# Altium PCB PCB1.PcbDoc
Units mm, origin at the board's own origin, x right, y up, seen from the top; angles counter-clockwise.
Board outline 37.97 x 24.64 mm, 2 copper layers (Top Layer, Bottom Layer); 5 components, 4 nets, 20 pads, 0 vias.
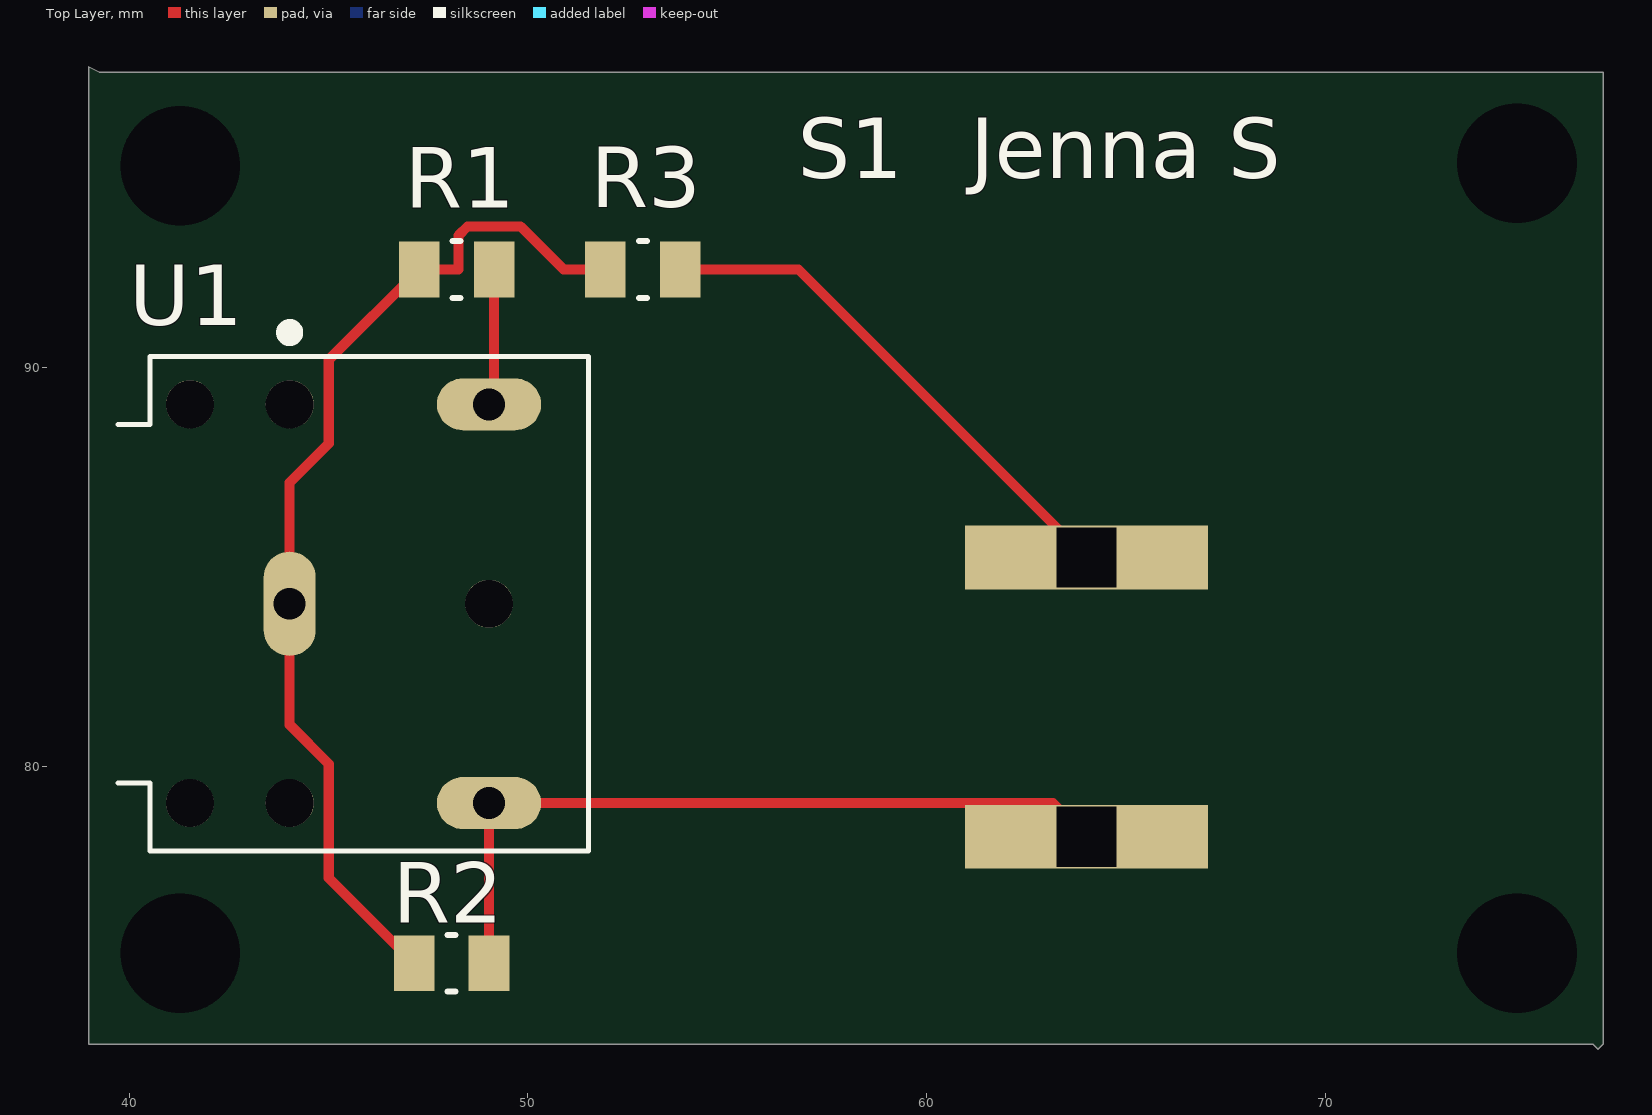
[diagram p0: Top Layer view]
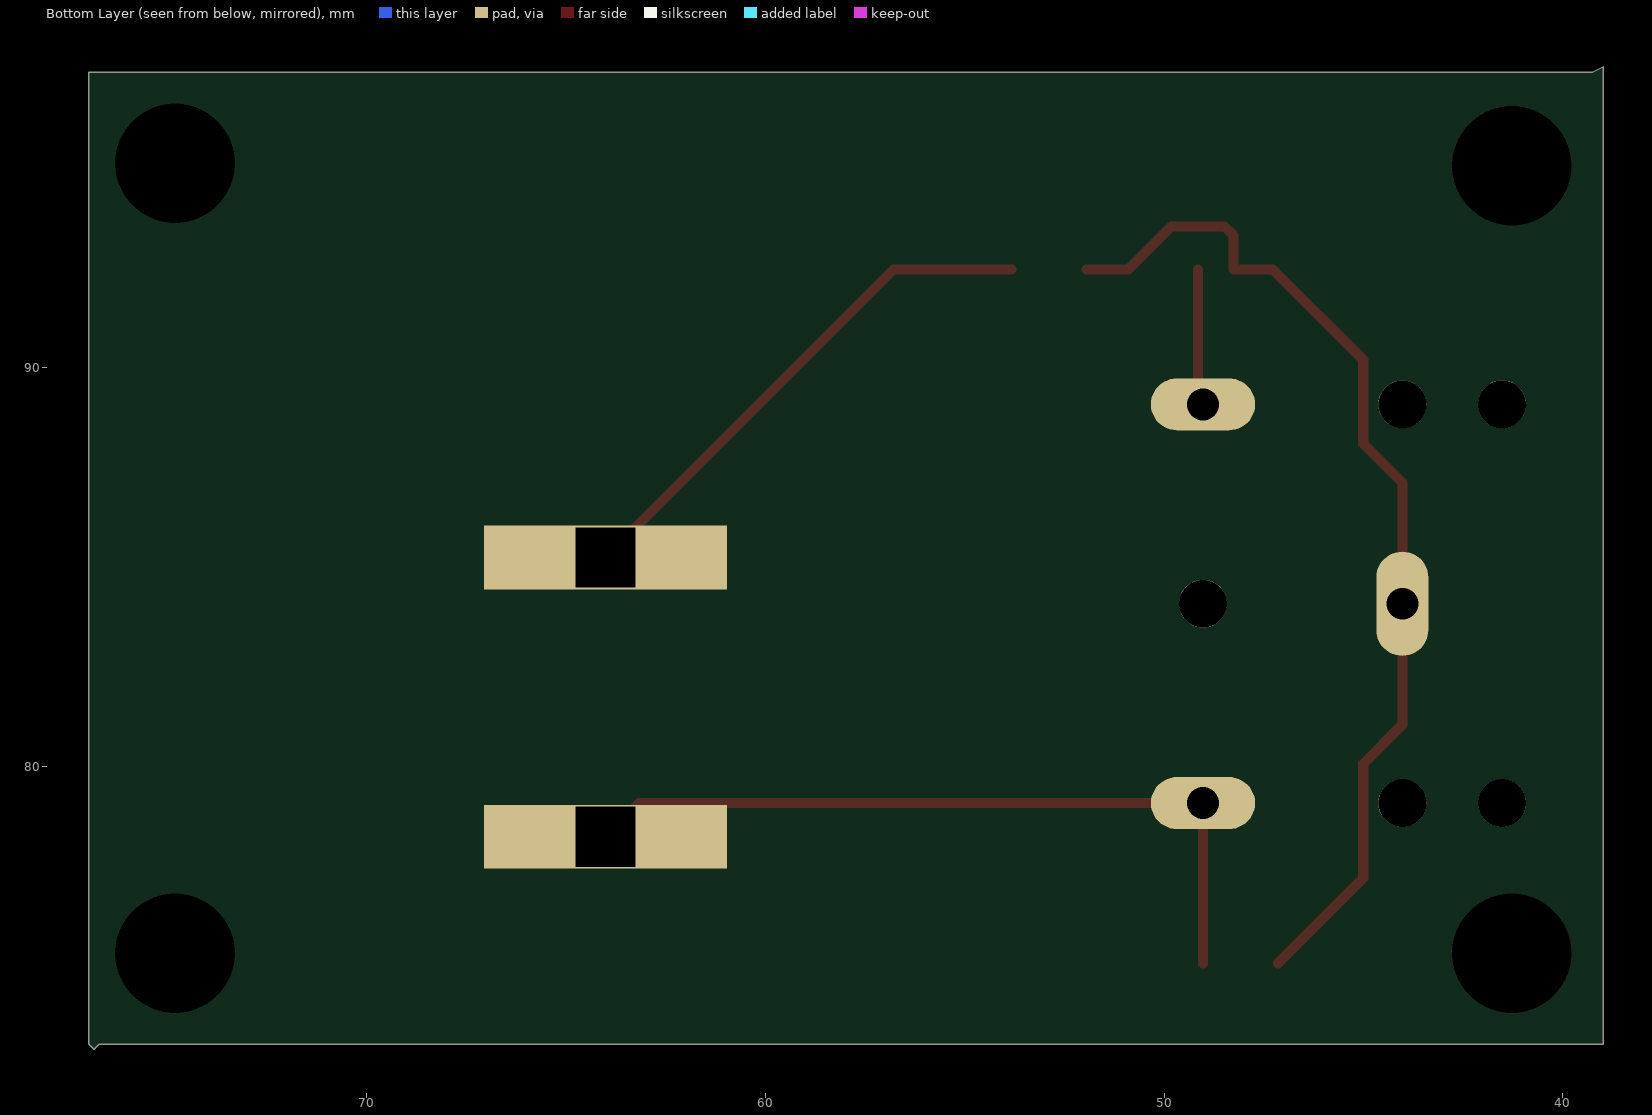
[diagram p1: Bottom Layer view, seen from below]

## Layer stack, top to bottom
Top Solder: solder mask 0.0102, Solder Resist, Dk 3.5
Top Layer: signal copper 0.0356
Dielectric 1: dielectric 0.32, FR-4, Dk 4.8
Bottom Layer: signal copper 0.0356
Bottom Solder: solder mask 0.0102, Solder Resist, Dk 3.5

## Board outline
38.989,97.536 38.989,73.025 76.708,73.025 76.835,72.898 76.962,73.025 76.962,97.409 39.243,97.409

## Design rules (kind name [scope] priority, off if disabled: settings)
Clearance [All] p1: gap=0.254 ignorepadtopadclearanceinfootprint=FALSE except(0: Arc-Hole Track-Hole SMDPad-Hole THPad-Hole Via-Hole Fill-Hole Poly-Hole Region-Hole Text-Hole)
PolygonConnect [All] p1: connectstyle=Relief reliefconductorwidth=0.254 reliefentries=4 polygonreliefangle="90 Angle" airgapwidth=0.254
RoomDefinition EStop [InComponentClass('EStop')] p1: confinementstyle=ConfineIn formatcopy=TRUE lockcomponents=FALSE outline 38.989,96.774 39.116,96.647 39.116,73.279 76.581,73.279 76.835,73.533 76.708,73.66 76.708,97.409 39.751,97.409 39.116,96.774
RoutingVias [All] p1: holewidth=0.711 width=1.27 viastyle="Through Hole" minholewidth=0.711 minwidth=1.27 maxholewidth=0.711 maxwidth=1.27
SolderMaskExpansion [All] p1: expansion=0.102
Width [All] p1: maxlimit=0.254 minlimit=0.254 preferedwidth=0.254
30 further rules are at their usual default settings.

## Components (designator, comment, footprint, x,y, rotation, side; value= is the part's Value field where it differs from the comment)
R1 "2.2k" RESC2013X65N 48.209,92.456 r180 top
R2 "2.2k" RESC2013X65N 48.082,75.057 r0 top
R3 "560" RESC2013X65N 52.883,92.456 r0 top
S1 "SPST Rocker" "SWITCH ROCKER SPST 10A 125V" 64.008,78.232 r0 top
U1 "35mm Aux Header" "35mm Aux Header" 45.265,84.047 r0 top

## Footprints (in the part's own frame and the unit in brackets; to place one, negate y for a bottom-side part, rotate by r counter-clockwise, add the part's x,y. Pads: shape width x height; smd on the part's side, far side on the other; paste and mask are expansions set on the pad)
"35mm Aux Header" [mm]
  oval 1.308x2.616 hole 0.8: 1(-1.243,0.027)
  oval 2.616x1.308 hole 0.8: 2(3.757,-4.973) 3(3.757,5.027)
  round 1.2 hole 1.2 unplated: None(-3.743,-4.973) None(-3.743,5.027) None(-1.243,-4.973) None(-1.243,5.027) None(3.757,0.027)
  silkscreen extent -5.54,-6.17 6.26,7
RESC2013X65N [mil]
  rect 40x55 smd: 1(-37,0) 2(37,0)
  silkscreen extent -4,-28 4,28
"SWITCH ROCKER SPST 10A 125V" [mm]
  rect 6.1x1.6 hole 1.5 square: 0(0,0) 1(0,7)
  body extent -7.3,-3.1 7.3,15.9, height 13.69

## Part data
R1 R2: library part "RES 2.2k 0805", "RES SMD 2.2K OHM 1% 1/8W 0805", Package=0805, Rating=0.125W, Tolerance=1%, Digikey=311-2.20KCRCT-ND, Digikey Link=https://www.digikey.ca/product-detail/en/yageo/RC0805FR-072K2L/311-2.20KCRCT-ND/730623, MF=Yageo, MP=RC0805FR-072K2L, Price="0.15 CAD"
R3: library part "RES 560 0805", "RES 560 OHM 1% 1/8W 0805", Package=0805, Rating=0.125W, Tolerance=1%, Digikey=RMCF0805FT560RCT-ND, Digikey Link=https://www.digikey.ca/product-detail/en/stackpole-electronics-inc/RMCF0805FT560R/RMCF0805FT560RCT-ND/2418431, MF="Stackpole Electronics Inc", MP=RMCF0805FT560R, Price="0.15 CAD"
S1: library part "SWITCH ROCKER SPST 10A 125V", "Rocker Switch SPST 10A (AC) 125V Panel Mount, Snap-In", Rating="10A 125V", Digikey=CH755-ND, Digikey Link=https://www.digikey.ca/product-detail/en/zf-electronics/SRB22A2FBBNN/CH755-ND/446021, MF="ZF Electronics", MP=SRB22A2FBBNN, Price="1.276 CAD"

## Free pads (board coordinates)
  round 1.524 hole 3: 1(41.275,75.311) 2(74.803,75.311) 3(74.803,95.123) 4(41.275,95.059)

## Nets (pads, with @x,y where several pads share a name; then routed paths per layer and width w, separated by ;. In a path a pad name is that pad's centre, name@x,y a point inside that pad or via, vN(x,y) a via of type N, cw(c..) or ccw(c..) an arc to the next point about the centre after c; other vN are vias at no path point)
NetR1_1: R1.1 U1.3 | length 3.4
  Top Layer w0.254: U1.3 49.149,89.201 R1.1
NetR1_2: R1.2 R2.1 R3.1 U1.1 | length 26.1
  Top Layer w0.254: R2.1 45.003,77.196 45.003,80.055 44.022,81.036 U1.1 44.022,87.112 45.003,88.093 45.003,90.19 R1.2 48.26,92.456 48.26,93.312 48.483,93.535 49.815,93.535 50.894,92.456 R3.1
NetR2_2: R2.2 S1.0 U1.2 | length 19.4
  Top Layer w0.254: R2.2 U1.2 63.166,79.074 S1.0
NetR3_2: R3.2 S1.1 | length 14.2
  Top Layer w0.254: R3.2 56.784,92.456 S1.1 ; S1.1@62.647,85.232 S1.1@63.627,85.232
pads on no net: U1.None

## Silkscreen, mask and mechanical layers (free items; w line width, h text height)
Top Overlay:
  text "Jenna S" at 61.087,94.742 h1.52
Mechanical 1:
  lines w1.2: 38.989,73.025 38.989,97.409 39.243,97.409 76.962,97.409 76.962,73.025 76.835,72.898 76.708,73.025 38.989,73.025